# Altium PCB lipo-supply.PcbDoc
Units mil, origin at the board's own origin, x right, y up, seen from the top; angles counter-clockwise.
Board outline 1800 x 3400 mil, 2 copper layers (Top Layer, Bottom Layer); 21 components, 17 nets, 62 pads, 8 vias.
Unrouted connection lines stored in the file: 2.
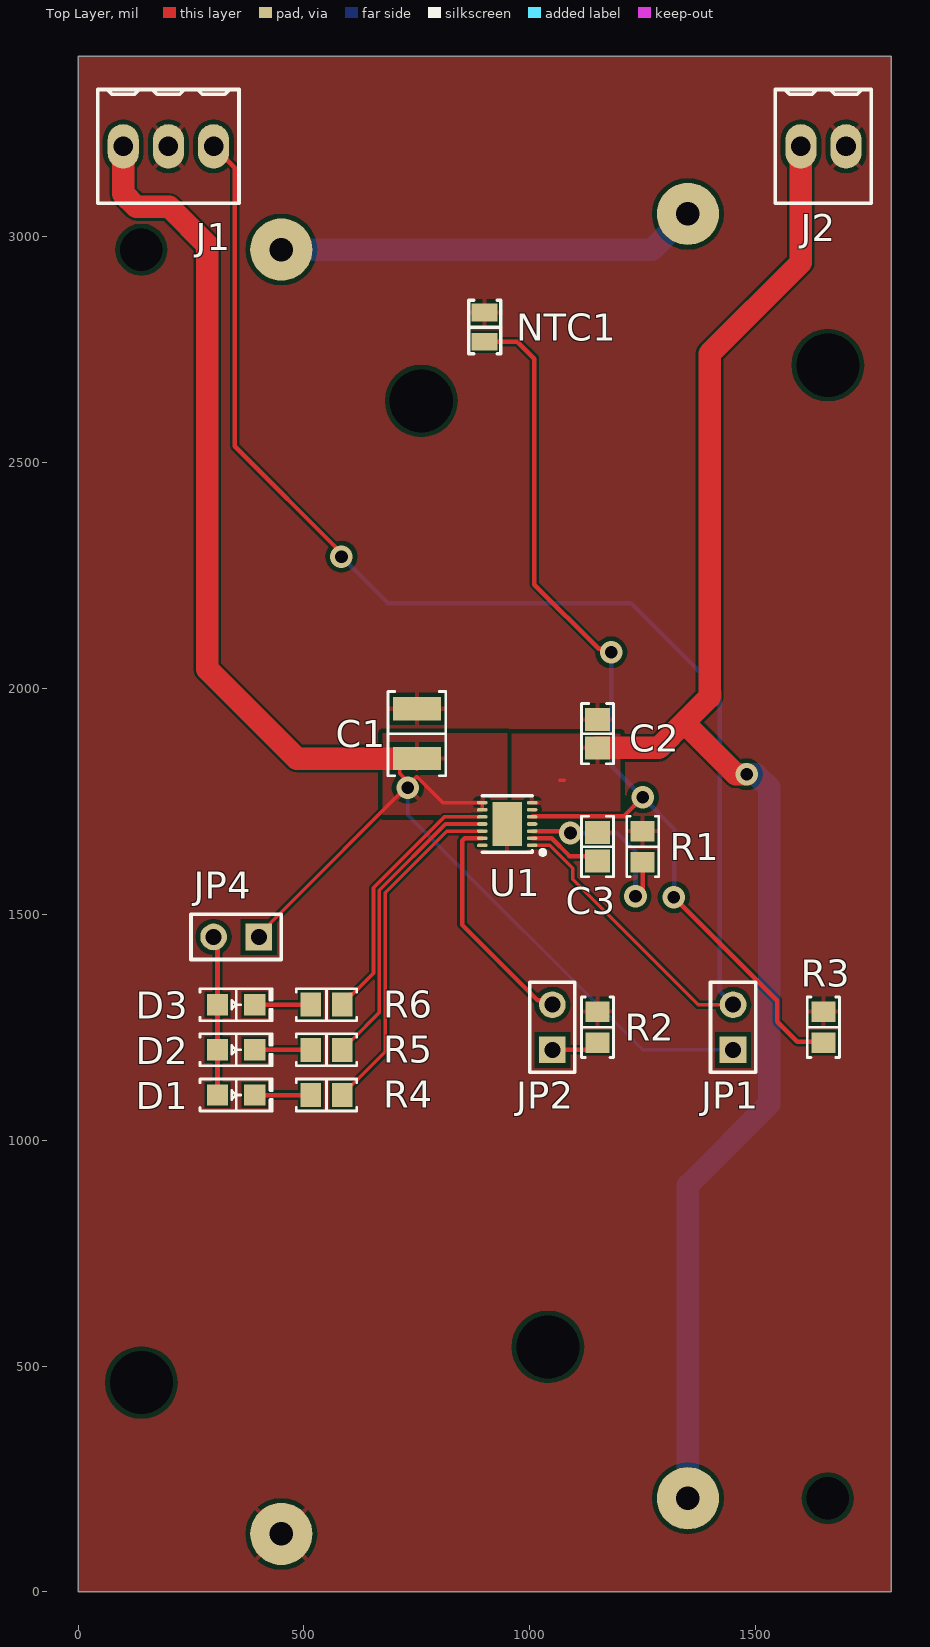
[diagram p0: Top Layer view]
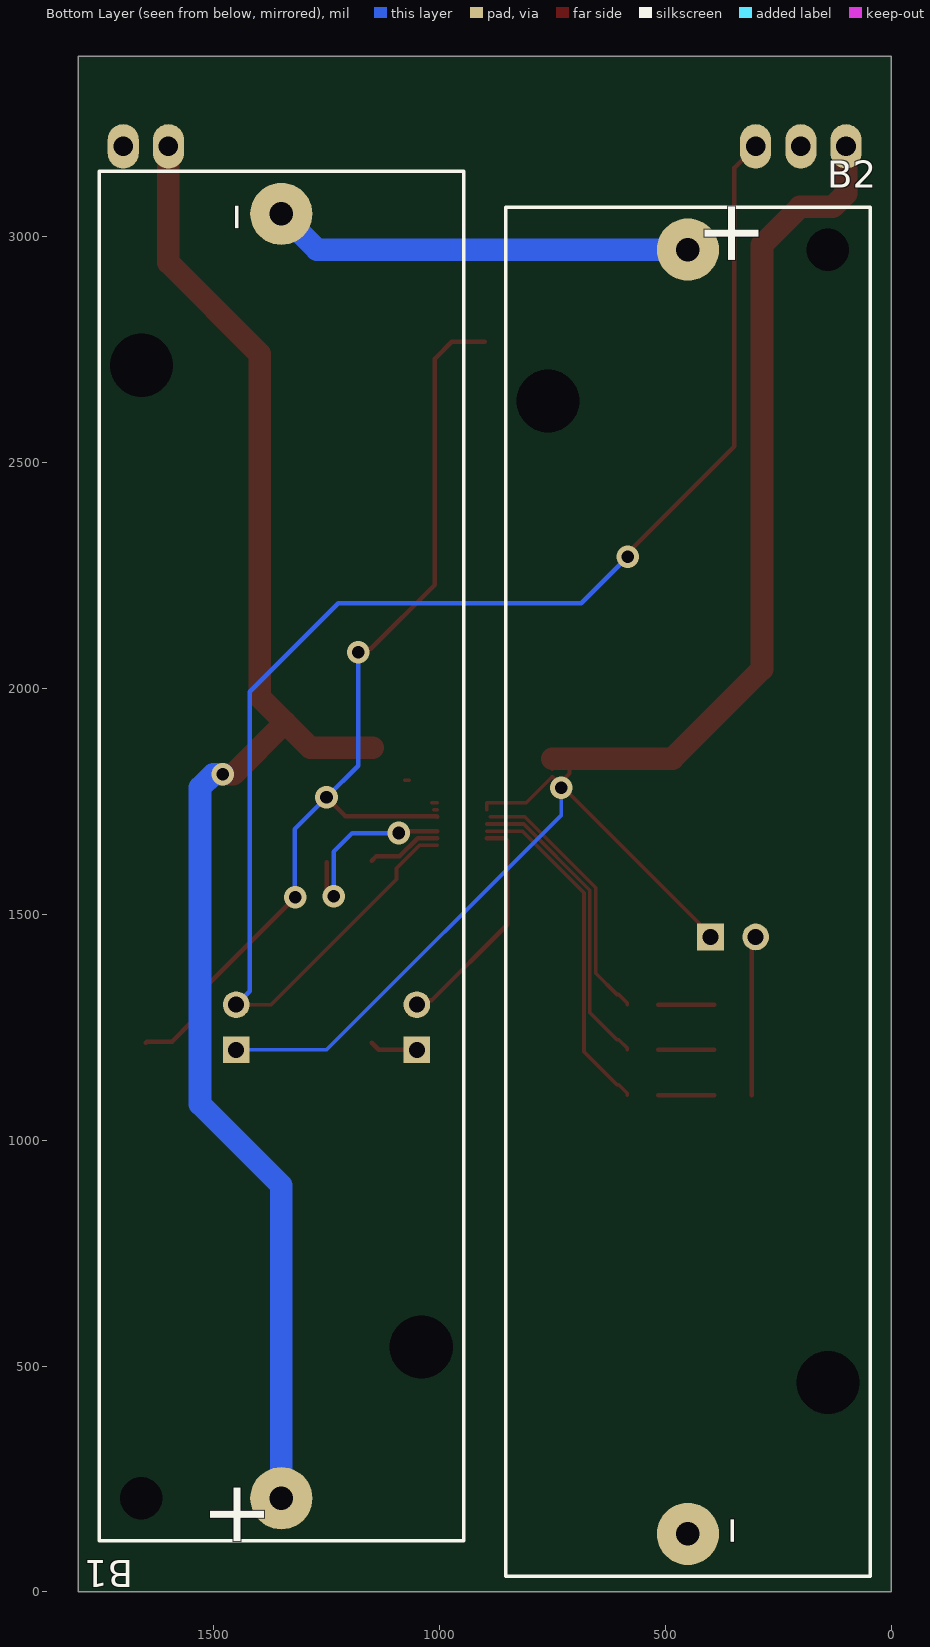
[diagram p1: Bottom Layer view, seen from below]
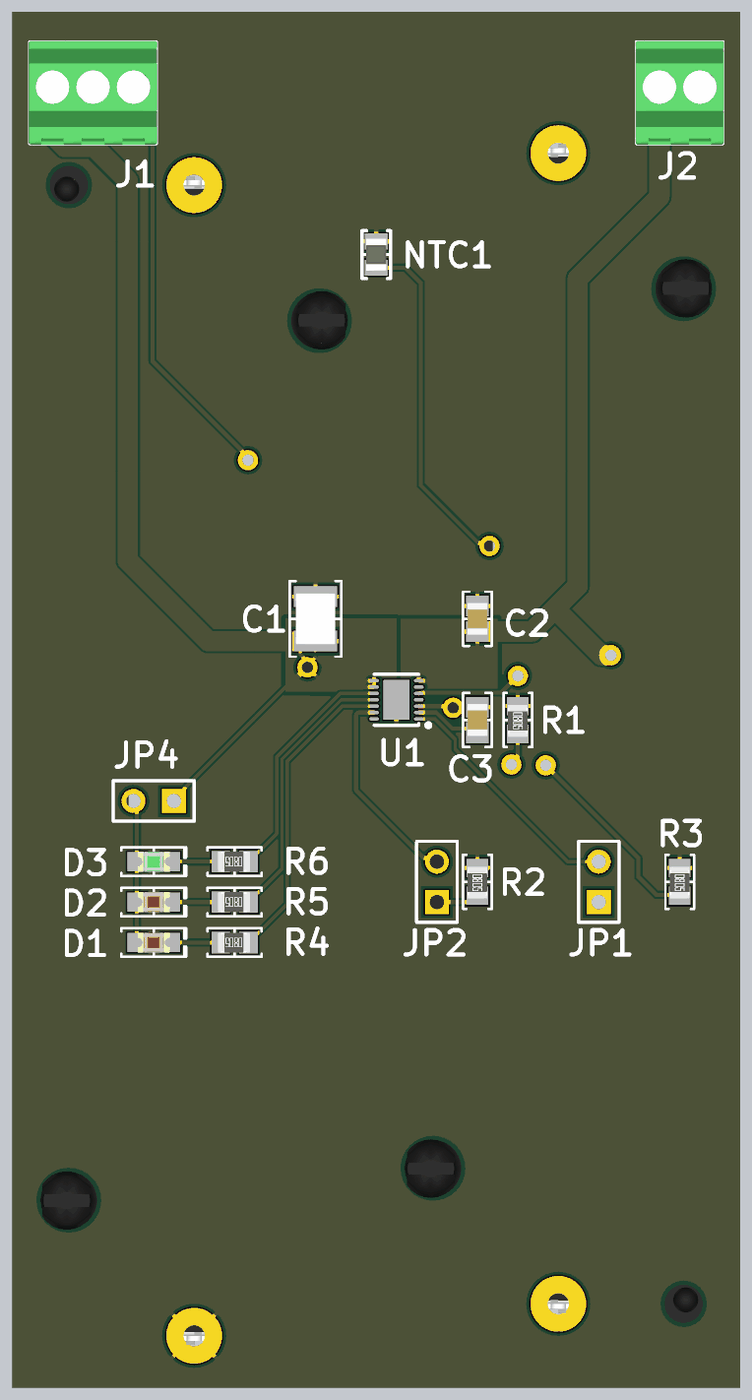
[diagram p2: 3D render of the assembled board from above, using the file's embedded part models]

## Layer stack, top to bottom
Top Solder: solder mask 0.4, Solder Resist, Dk 3.5
Top Layer: signal copper 1.4
Dielectric 1: dielectric 12.6, FR-4, Dk 4.8
Bottom Layer: signal copper 1.4
Bottom Solder: solder mask 0.4, Solder Resist, Dk 3.5

## Board outline
0,0 1800,0 1800,3400 0,3400

## Design rules (kind name [scope] priority, off if disabled: settings)
Clearance [All] p1: gap=5 ignorepadtopadclearanceinfootprint=FALSE except(0: THPad-Hole Via-Hole Fill-Hole Poly-Hole Region-Hole Text-Hole; 10: THPad-THPad THPad-Via THPad-Fill THPad-Poly THPad-Region THPad-Text Via-Via Via-Fill Via-Poly Via-Region Via-Text Fill-Fill Fill-Poly Fill-Region Fill-Text Poly-Poly Poly-Region Poly-Text Region-Region Region-Text Text-Text)
PolygonConnect [All] p1: thpad.connectstyle=Relief thpad.reliefconductorwidth=10 thpad.reliefentries=4 thpad.polygonreliefangle="45 Angle" thpad.airgapwidth=10 smdpad.connectstyle=Relief smdpad.reliefconductorwidth=10 smdpad.reliefentries=4 smdpad.polygonreliefangle="90 Angle" smdpad.airgapwidth=10 via.connectstyle=Relief via.reliefconductorwidth=10 via.reliefentries=4 via.polygonreliefangle="45 Angle" via.airgapwidth=10
RoomDefinition lipo-supply [InComponentClass('lipo-supply')] p1: confinementstyle=ConfineIn formatcopy=TRUE lockcomponents=FALSE outline 6045,60 12600,60 12600,3230 6045,3230
RoutingVias [All] p1: holewidth=28 width=50 viastyle="Through Hole" minholewidth=28 minwidth=50 maxholewidth=28 maxwidth=50
SolderMaskExpansion [All] p1: expansion=4 istentingtop=FALSE
Width [All] p1: maxlimit=100 minlimit=8 preferedwidth=10 minimp=50.000000 maximp=50.000000 favimp=50.000000
30 further rules are at their usual default settings.

## Components (designator, comment, footprint, x,y, rotation, side; value= is the part's Value field where it differs from the comment)
B1 "1043" "KEYSTONE 1043" 1350,1628.98 r270 bottom
B2 "1043" "KEYSTONE 1043" 450,1550 r90 bottom
C1 "10µF" "CAP 1210_3225 - 2.8MM" 750,1900 r270 top
C2 "10µF" "CAP 0805_2012" 1150,1900 r270 top
C3 "0.1µF" "CAP 0805_2012" 1150,1650 r270 top
D1 "Red" "LED 0805_2012 RED" 350,1100 r0 top
D2 "Red" "LED 0805_2012 RED" 350,1200 r0 top
D3 "Green" "LED 0805_2012 GREEN" 350,1300 r0 top
J1 "282834-3" "TE 282834-3" 200,3200 r0 top
J2 "282834-2" "TE 282834-2" 1650,3200 r0 top
JP1 "Header 2" HDR1X2 1450,1200 r90 top
JP2 "Header 2" HDR1X2 1050,1200 r90 top
JP4 "Header 2" HDR1X2 400,1450 r180 top
NTC1 "NTC0805J10K" "NTC 0805_2012" 900,2800 r90 top
R1 "1.74 kOhms" "RES 0805_2012" 1250,1650 r270 top
R2 "10 kOhms" "RES 0805_2012" 1150,1250 r270 top
R3 "10 kOhms" "RES 0805_2012" 1650,1250 r270 top
R4 "2.2 kOhms" "RES 0805_2012" 550,1100 r180 top
R5 "2.2 kOhms" "RES 0805_2012" 550,1200 r180 top
R6 "2.2 kOhms" "RES 0805_2012" 550,1300 r180 top
U1 "AAT3663IWO-8.4-2-T1" "SKYWORKS TDFN-14 3X3MM" 950,1700 r180 top

## Footprints (in the part's own frame and the unit in brackets; to place one, negate y for a bottom-side part, rotate by r counter-clockwise, add the part's x,y. Pads: shape width x height; smd on the part's side, far side on the other; paste and mask are expansions set on the pad)
"CAP 0805_2012" [mm] "Chip Capacitor, 2-Leads, Body 2.00x1.20mm, IPC Medium Density"
  rect 1.3x1.4 smd: 1(-0.8,0) 2(0.8,0)
  silkscreen extent -1.7,-0.9 1.7,0.9, body extent -1,-0.64 1,0.64, height 1.26
"CAP 1210_3225 - 2.8MM" [mm] "Chip Capacitor, 2-Leads, Body 3.20x2.50mm, IPC Medium Density"
  rect 1.3x2.7 smd: 1(-1.4,0) 2(1.4,0)
  silkscreen extent -2.37,-1.63 2.37,1.63, body extent -1.6,-1.25 1.6,1.25, height 2.8
HDR1X2 [mm] "Connector; Header; 2 Position"
  rect 1.5x1.5 hole 0.9: 1(0,0)
  round 1.5 hole 0.9: 2(2.54,0)
  silkscreen extent -1.27,-1.27 3.81,1.27
"KEYSTONE 1043" [mm]
  round 3.5 hole 1.32 unplated: 1(36.11,0) 2(-36.11,0)
  rect 0x0 hole 3.55 unplated: M(-27.6,-7.87) M(27.6,7.87)
  rect 0x0 hole 2.39 unplated: M(36.11,-7.87)
  silkscreen extent -38.5,-10.25 38.5,10.25, body extent -38.53,-10.32 38.53,10.33, height 14.86
"LED 0805_2012 GREEN" [mm] "Chip Diode, 2-Leads, Body 2.00x1.25mm, IPC Medium Density"
  rect 1.2x1.2 smd: 1(-1.05,0) 2(1.05,0)
  silkscreen extent -2.03,-0.9 2.03,0.9, body extent -1,-0.62 1,0.63, height 0.9
"LED 0805_2012 RED" [mm] "Chip Diode, 2-Leads, Body 2.00x1.25mm, IPC Medium Density"
  rect 1.2x1.2 smd: 1(-1.05,0) 2(1.05,0)
  silkscreen extent -2.03,-0.9 2.03,0.9, body extent -1,-0.62 1,0.63, height 0.9
"NTC 0805_2012" [mm] "Chip Thermistor, 2-Leads, Body 2.00x1.25mm, IPC Medium Density"
  rect 1x1.45 smd: 1(-0.825,0) 2(0.825,0)
  silkscreen extent -1.5,-0.9 1.5,0.9, body extent -1,-0.64 1,0.64, height 1.27
"RES 0805_2012" [mm] "Chip Resistor, 2-Leads, Body 2.00x1.25mm, IPC Medium Density"
  rect 1.15x1.35 smd: 1(-0.875,0) 2(0.875,0)
  silkscreen extent -1.7,-0.9 1.7,0.9, body extent -0.95,-0.62 1.05,0.63, height 0.6
"SKYWORKS TDFN-14 3X3MM" [mm] "TDFN, 14-Leads, Body 3.00x3.00mm, Pitch 0.40mm, Thermal Pad 1.65x2.50mm, IPC Medium Density"
  oval 0.6x0.2 smd: 1(-1.4,1.2) 2(-1.4,0.8) 3(-1.4,0.4) 4(-1.4,0) 5(-1.4,-0.4) 6(-1.4,-0.8) 7(-1.4,-1.2) 8(1.4,-1.2) 9(1.4,-0.8) 10(1.4,-0.4) 11(1.4,0) 12(1.4,0.4) 13(1.4,0.8) 14(1.4,1.2)
  rect 1.65x2.5 smd: 15(0,0)
  silkscreen extent -2.13,-1.6 1.4,1.72, body extent -1.53,-1.53 1.53,1.53, height 0.8
"TE 282834-2" [mm]
  oval 1.75x2.5 hole 1.1: 1(-1.27,0) 2(1.27,0)
  silkscreen extent -2.7,-3.2 2.7,3.2, body extent -2.77,-3.25 2.77,3.25, height 10
"TE 282834-3" [mm]
  oval 1.75x2.5 hole 1.1: 1(-2.54,0) 2(0,0) 3(2.54,0)
  silkscreen extent -3.97,-3.2 3.97,3.2, body extent -4.04,-3.25 4.04,3.25, height 10

## Part data
B1 B2: "BATTERY HOLDER 18650 PC PIN", Manufacturer="Keystone Electronics", Operating Temperature="-50°C ~ 145°C", Supplier Part Number 1=36-1043-ND, Battery Cell Size=18650, Battery Type, Function="Cylindrical, Holder", ComponentLink1Description=Datasheet, ComponentLink1URL=http://keyelco.com/userAssets/file/M65p27.pdf, ComponentLink2Description="DigiKey Link", ComponentLink2URL=http://digikey.com/product-detail/en/keystone-electronics/1043/36-1043-ND/2745669, Height Above Board="0.585\" (14.86mm)", LastUpdated="2/2/2020 9:19:56 AM", Lifecycle Status=Active, Minimum Order=1, Mounting Type="PCB, Through Hole", Number of Cells=1, Packaging=Unknown, Part Number=1043, Part Status=Active, PartId=2, Price=2.58, Series=-, Style="Holder (Open)", Supplier 1=DigiKey, Termination Style="PC Pin"
C1: library part GCG32ER71E106KA12L, "CAP CER 10UF 25V X7R 1210 EPOXY", Device Package="1210 (3225 Metric)", Manufacturer="Murata Electronics", Operating Temperature="-55°C ~ 125°C", Ratings=AEC-Q200, Supplier Part Number 1=490-18199-1-ND, Temperature Coefficient=X7R, Tolerance=±10%, Voltage - Rated=25V, Applications=Automotive, Capacitance=10µF, ComponentLink1Description=Datasheet, ComponentLink1URL=https://search.murata.co.jp/Ceramy/image/img/A01X/G101/ENG/GCG32ER71E106KA12-01.pdf, ComponentLink2Description="DigiKey Link", ComponentLink2URL=http://digikey.com/product-detail/en/murata-electronics/GCG32ER71E106KA12L/490-18199-1-ND/9867928, Features="Epoxy Mountable", LastUpdated="1/21/2020 12:30:50 AM", Lifecycle Status=Active, Minimum Order=1, Mounting Type="Surface Mount, MLCC, Epoxy", Package / Case="1210 (3225 Metric)", Packaging=TapeAndReel, Part Number=GCG32ER71E106KA12L, Part Status=Active, PartId=23619, Price=0.52, Series=GCG, Size / Dimension="0.126\" L x 0.098\" W (3.20mm x 2.50mm)", Supplier 1=DigiKey, Thickness (Max)="0.110\" (2.80mm)"
C2: library part EMK212BB7106MG-T, "CAP CER 10UF 16V X7R 0805", Device Package="0805 (2012 Metric)", Manufacturer="Taiyo Yuden", Operating Temperature="-55°C ~ 125°C", Supplier Part Number 1=587-3319-1-ND, Temperature Coefficient=X7R, Tolerance=±20%, Voltage - Rated=16V, Applications="General Purpose", Capacitance=10µF, ComponentLink1Description=Datasheet, ComponentLink1URL=http://www.yuden.co.jp/productdata/catalog/mlcc06_e.pdf, ComponentLink2Description="DigiKey Link", ComponentLink2URL=http://digikey.com/product-detail/en/taiyo-yuden/EMK212BB7106MG-T/587-3319-1-ND/4157364, LastUpdated="1/21/2020 12:03:05 AM", Lifecycle Status=Active, Minimum Order=1, Mounting Type="Surface Mount, MLCC", Package / Case="0805 (2012 Metric)", Packaging=TapeAndReel, Part Number=EMK212BB7106MG-T, Part Status=Active, PartId=3069, Price=0.11, Series=M, Size / Dimension="0.079\" L x 0.049\" W (2.00mm x 1.25mm)", Supplier 1=DigiKey, Thickness (Max)="0.053\" (1.35mm)"
C3: library part 0805B104K160CT, "CAP CER 0.1UF 16V X7R 0805", Device Package="0805 (2012 Metric)", Manufacturer="Walsin Technology Corporation", Operating Temperature="-55°C ~ 125°C", Supplier Part Number 1=1292-1565-1-ND, Temperature Coefficient=X7R, Tolerance=±10%, Voltage - Rated=16V, Applications="General Purpose", Capacitance=0.1µF, ComponentLink1Description=Datasheet, ComponentLink1URL=http://www.passivecomponent.com/wp-content/uploads/2018/10/MLCC.pdf, ComponentLink2Description="DigiKey Link", ComponentLink2URL=http://digikey.com/product-detail/en/walsin-technology-corporation/0805B104K160CT/1292-1565-1-ND/9355569, LastUpdated="1/21/2020 12:03:02 AM", Lifecycle Status=Active, Minimum Order=1, Mounting Type="Surface Mount, MLCC", Package / Case="0805 (2012 Metric)", Packaging=TapeAndReel, Part Number=0805B104K160CT, Part Status=Active, PartId=4882, Price=0.02, Series=-, Size / Dimension="0.079\" L x 0.049\" W (2.00mm x 1.25mm)", Supplier 1=DigiKey, Thickness (Max)="0.035\" (0.90mm)"
D1 D2: library part 5990110007F, "LED RED 0805 SMD", Current - Test=20mA, Device Package="0805 (2012 Metric)", Lens Color=0.80mm, Manufacturer=Dialight, Millicandela Rating=29mcd, Supplier Device Package=0805, Supplier Part Number 1=350-4353-1-ND, Voltage - Forward (Vf) (Typ)=2.1V, Color=Red, ComponentLink1Description=Datasheet, ComponentLink1URL=http://www.dialightsignalsandcomponents.com/Assets/Brochures_And_Catalogs/Indication/CBI_SMD_new/Dialight_CBI_data_599-0805_Apr2018.pdf, ComponentLink2Description="DigiKey Link", ComponentLink2URL=http://digikey.com/product-detail/en/dialight/5990110007F/350-4353-1-ND/9385459, Configuration=Standard, Height (Max)=0.80mm, LastUpdated="1/21/2020 3:13:52 AM", Lens Size="1.40mm x 1.25mm", Lens Style="Rectangle with Flat Top", Lifecycle Status=Active, Minimum Order=1, Mounting Type="Surface Mount", Package / Case="0805 (2012 Metric)", Packaging=TapeAndReel, Part Number=5990110007F, Part Status=Active, PartId=308, Price=0.07, Series=599, Size / Dimension="2.00mm L x 1.25mm W", Supplier 1=DigiKey, Viewing Angle=140°, Wavelength - Dominant=633nm
D3: library part 5975316507F, "LED GREEN 0805 SMD", Current - Test=20mA, Device Package="0805 (2012 Metric)", Lens Color=0.93mm, Manufacturer=Dialight, Millicandela Rating=16mcd, Supplier Device Package=0805, Supplier Part Number 1=350-4389-1-ND, Voltage - Forward (Vf) (Typ)=2.2V, Color=Green, ComponentLink1Description=Datasheet, ComponentLink1URL=http://www.dialightsignalsandcomponents.com/Assets/Drawings/2D_Drawings_DrawingDetailedSpec/NewDrawings/18370A.pdf, ComponentLink2Description="DigiKey Link", ComponentLink2URL=http://digikey.com/product-detail/en/dialight/5975316507F/350-4389-1-ND/9385495, Configuration=Standard, Height (Max)=0.93mm, LastUpdated="1/21/2020 3:14:10 AM", Lens Size="1.40mm x 1.24mm", Lens Style="Rectangle with Flat Top", Lifecycle Status=Active, Minimum Order=1, Mounting Type="Surface Mount", Package / Case="0805 (2012 Metric)", Packaging=TapeAndReel, Part Number=5975316507F, Part Status=Active, PartId=245, Price=0.15, Series=597, Size / Dimension="2.00mm L x 1.25mm W", Supplier 1=DigiKey, Wavelength - Dominant=560nm
J1: "TERM BLK 3P SIDE ENT 2.54MM PCB", Color=Green, Current=10A, Manufacturer="TE Connectivity AMP Connectors", Supplier Part Number 1=A98334-ND, Voltage=150V, ComponentLink1Description=Datasheet, ComponentLink1URL=https://www.te.com/commerce/DocumentDelivery/DDEController?Action=srchrtrv&DocNm=282834&DocType=Customer+Drawing&DocLang=English, ComponentLink2Description="DigiKey Link", ComponentLink2URL=http://digikey.com/product-detail/en/te-connectivity-amp-connectors/282834-3/A98334-ND/1153264, LastUpdated="1/15/2020 4:15:50 AM", Lifecycle Status=Active, Mating Orientation="Horizontal with Board", Minimum Order=1, Mounting Type="Through Hole", Number of Levels=1, Packaging=Bulk, Part Number=282834-3, Part Status=Active, Pitch="0.100\" (2.54mm)", Positions Per Level=3, Price=2.01, Series=Buchanan, Supplier 1=DigiKey, Wire Gauge="16-30 AWG", Wire Termination="Screw - Rising Cage Clamp"
J2: "TERM BLK 2P SIDE ENT 2.54MM PCB", Color=Green, Current=10A, Manufacturer="TE Connectivity AMP Connectors", Supplier Part Number 1=A98333-ND, Voltage=150V, ComponentLink1Description=Datasheet, ComponentLink1URL=https://www.te.com/commerce/DocumentDelivery/DDEController?Action=srchrtrv&DocNm=282834&DocType=Customer+Drawing&DocLang=English, ComponentLink2Description="DigiKey Link", ComponentLink2URL=http://digikey.com/product-detail/en/te-connectivity-amp-connectors/282834-2/A98333-ND/1150135, LastUpdated="1/15/2020 4:15:38 AM", Lifecycle Status=Active, Mating Orientation="Horizontal with Board", Minimum Order=1, Mounting Type="Through Hole", Number of Levels=1, Packaging=Bulk, Part Number=282834-2, Part Status=Active, Pitch="0.100\" (2.54mm)", Positions Per Level=2, Price=0.88, Series=Buchanan, Supplier 1=DigiKey, Wire Gauge="16-30 AWG", Wire Termination="Screw - Rising Cage Clamp"
JP1 JP2 JP4: "Header, 2-Pin", LatestRevisionDate=17-Jul-2002, LatestRevisionNote="Re-released for DXP Platform.", Publisher="Altium Limited"
NTC1: "THERMISTOR NTC 10KOHM 0805", B Value Tolerance=±5%, Device Package="0805 (2012 Metric)", Manufacturer="TE Connectivity Passive Product", Operating Temperature="-55°C ~ 125°C", Power - Max=125mW, Resistance in Ohms @ 25°C=10k, Supplier Part Number 1=A106104CT-ND, ComponentLink1Description=Datasheet, ComponentLink1URL=https://www.te.com/commerce/DocumentDelivery/DDEController?Action=srchrtrv&DocNm=1624345&DocType=Customer+Drawing&DocLang=English, ComponentLink2Description="DigiKey Link", ComponentLink2URL=http://digikey.com/product-detail/en/te-connectivity-passive-product/NTC0805J10K/A106104CT-ND/3477761, LastUpdated="1/21/2020 3:31:41 AM", Lifecycle Status=Active, Minimum Order=1, Mounting Type="Surface Mount", Package / Case="0805 (2012 Metric)", Packaging=TapeAndReel, Part Number=NTC0805J10K, Part Status=Active, PartId=574, Price=0.40, Resistance Tolerance=±5%, Series=Neohm, Supplier 1=DigiKey
R1: library part KTR10EZPF1741, "RES SMD 1.74K OHM 1% 1/8W 0805", Device Package="0805 (2012 Metric)", Manufacturer="Rohm Semiconductor", Operating Temperature="-55°C ~ 155°C", Power (Watts)="0.125W, 1/8W", Ratings=AEC-Q200, Supplier Device Package=0805, Supplier Part Number 1=RHM1.74KAHCT-ND, Temperature Coefficient=±100ppm/°C, Tolerance=±1%, ComponentLink1Description=Datasheet, ComponentLink1URL=https://www.rohm.com/datasheet/KTR03EZPF/ktr-e, ComponentLink2Description="DigiKey Link", ComponentLink2URL=http://digikey.com/product-detail/en/rohm-semiconductor/KTR10EZPF1741/RHM1.74KAHCT-ND/4054354, Composition="Thick Film", Features="Automotive AEC-Q200, High Voltage", Height - Seated (Max)="0.026\" (0.65mm)", LastUpdated="1/21/2020 1:49:27 AM", Lifecycle Status=Active, Minimum Order=1, Number of Terminations=2, Package / Case="0805 (2012 Metric)", Packaging=TapeAndReel, Part Number=KTR10EZPF1741, Part Status=Active, PartId=29167, Price=0.02, Resistance="1.74 kOhms", Series=KTR, Size / Dimension="0.079\" L x 0.049\" W (2.00mm x 1.25mm)", Supplier 1=DigiKey
R2 R3: library part RT0805DRD0710KL, "RES SMD 10K OHM 0.5% 1/8W 0805", Device Package="0805 (2012 Metric)", Manufacturer=Yageo, Operating Temperature="-55°C ~ 155°C", Power (Watts)="0.125W, 1/8W", Supplier Device Package=0805, Supplier Part Number 1=311-2699-1-ND, Temperature Coefficient=±25ppm/°C, Tolerance=±0.5%, ComponentLink1Description=Datasheet, ComponentLink1URL=https://www.yageo.com/upload/media/product/productsearch/datasheet/rchip/PYu-RT_1-to-0.01_RoHS_L_11.pdf, ComponentLink2Description="DigiKey Link", ComponentLink2URL=http://digikey.com/product-detail/en/yageo/RT0805DRD0710KL/311-2699-1-ND/6129118, Composition="Thin Film", Height - Seated (Max)="0.024\" (0.60mm)", LastUpdated="1/21/2020 1:50:02 AM", Lifecycle Status=Active, Minimum Order=1, Number of Terminations=2, Package / Case="0805 (2012 Metric)", Packaging=TapeAndReel, Part Number=RT0805DRD0710KL, Part Status=Active, PartId=27797, Price=0.03, Resistance="10 kOhms", Series=RT, Size / Dimension="0.079\" L x 0.049\" W (2.00mm x 1.25mm)", Supplier 1=DigiKey
R4 R5 R6: library part SR0805JR-7W2K2L, "RES SMD 2.2K OHM 5% 1/4W 0805", Device Package="0805 (2012 Metric)", Manufacturer=Yageo, Operating Temperature="-55°C ~ 155°C", Power (Watts)="0.25W, 1/4W", Ratings=AEC-Q200, Supplier Device Package=0805, Supplier Part Number 1=YAG6054CT-ND, Temperature Coefficient=±200ppm/°C, Tolerance=±5%, ComponentLink1Description=Datasheet, ComponentLink1URL=http://www.yageo.com/documents/recent/PYu-SR_20105_RoHS_L_8.pdf, ComponentLink2Description="DigiKey Link", ComponentLink2URL=http://digikey.com/product-detail/en/yageo/SR0805JR-7W2K2L/YAG6054CT-ND/9696508, Composition="Thick Film", Features="Automotive AEC-Q200, Pulse Withstanding", Height - Seated (Max)="0.024\" (0.60mm)", LastUpdated="1/21/2020 1:50:02 AM", Lifecycle Status=Active, Minimum Order=1, Number of Terminations=2, Package / Case="0805 (2012 Metric)", Packaging=TapeAndReel, Part Number=SR0805JR-7W2K2L, Part Status=Active, PartId=27793, Price=0.03, Resistance="2.2 kOhms", Series=SR, Size / Dimension="0.079\" L x 0.049\" W (2.00mm x 1.25mm)", Supplier 1=DigiKey
U1: "IC LI-ION CHARGER 14-DFN", Battery Pack Voltage=8.4V, Charge Current - Max=1A, Current - Charging="Constant - Programmable", Device Package="14-WFDFN Exposed Pad", Manufacturer="Skyworks Solutions Inc.", Operating Temperature="-40°C ~ 85°C (TA)", Supplier Device Package="14-TDFN (3x3)", Supplier Part Number 1=863-1544-2-ND, Voltage - Supply (Max)=13.2V, Battery Chemistry="Lithium Ion/Polymer", ComponentLink1Description=Datasheet, ComponentLink1URL=http://www.skyworksinc.com/uploads/documents/AAT3663_201878C.pdf, ComponentLink2Description="DigiKey Link", ComponentLink2URL=//digikey.com/product-detail/en/skyworks-solutions-inc/AAT3663IWO-8.4-2-T1/863-1544-2-ND/4753043, Fault Protection="Over Current, Over Temperature, Over Voltage, Short Circuit", Interface=USB, LastUpdated="12/6/2019 2:00:27 AM", Lifecycle Status=0, Minimum Order=1, Mounting Type="Surface Mount", Number of Cells=2, Package / Case="14-WFDFN Exposed Pad", Packaging=TapeAndReel, Part Number=AAT3663IWO-8.4-2-T1, Part Status=Active, PartId=23, Price=0.78, Programmable Features=Current, Series=BatteryManager™, Supplier 1=DigiKey

## Via types
v1: diameter 50, hole 28, Top Layer to Bottom Layer, 8 vias

## Nets (pads, with @x,y where several pads share a name; then routed paths per layer and width w, separated by ;. In a path a pad name is that pad's centre, name@x,y a point inside that pad or via, vN(x,y) a via of type N, cw(c..) or ccw(c..) an arc to the next point about the centre after c; other vN are vias at no path point)
EN: J1.3 JP1.2 U1.1 | length 3296.6
  Top Layer w8: U1.1 1044.24,1652.76 1095,1602 1095,1578 1373,1300 JP1.2
  Top Layer w10: J1.3 347,3153 347,2536 583,2300 v1(583,2292)
  Bottom Layer w10: v1(583,2292) 686,2189 1224,2189 1420,1993 1420,1330 JP1.2
GND: B2.2 C1.1 C2.1 C3.1 J1.2 J2.2 NTC1.2 R1.1 R2.1 R3.1 U1.4 U1.15
IN: C1.2 J1.1 JP1.1 JP4.1 U1.8 U1.9 | length 3657.7
  Top Layer w8: JP4.1 425.53,1475.53 425.53,1480.53 750,1805 752.5,1802.5 807.76,1747.24 U1.8 U1.9 ; v1(730,1780) 730,1793.96 711.98,1811.98 711.98,1823.29 720.09,1831.41 733.57,1844.88 C1.2 ; C1.2 750,1821.12 761.88,1833 C1.2
  Top Layer w50: J1.1 100,3095.29 129.29,3066 202,3066 286,2982 286,2043 484.12,1844.88 C1.2
  Bottom Layer w8: v1(730,1780) 730,1720 1250,1200 JP1.1
NetB1_1: B1.1 C2.2 J2.1 U1.6 U1.7 | length 3524.5
  Top Layer w8: U1.6 U1.6@1012.87,1731.5 ; U1.7 U1.7@1016.82,1747.24 ; 1066.65,1797.08 1076.61,1797.08
  Top Layer w50: C2.2@1148.03,1868.5 C2.2 1285.5,1868.5 1341.75,1924.75 ; v1(1480,1810) 1456.5,1810 1341.75,1924.75 ; J2.1 1600,2943 1398,2741 1398,1981 1341.75,1924.75
  Bottom Layer w50: B1.1 1350,900 1530,1080 1530,1780.71 1500.71,1810 v1(1480,1810)
NetB1_2: B1.2 B2.1 | length 932.7
  Bottom Layer w50: B2.1 1271.02,2971.65 B1.2
NetC3_2: C3.2 U1.2 | length 165.6
  Top Layer w10: U1.2 1048.3,1668.5 1087.8,1629 1139.5,1629 C3.2
NetD1_1: D1.1 D2.1 D3.1 JP4.2 | length 353.6
  Top Layer w10: JP4.2 308.66,1441.34 D3.1 D2.1 D1.1
NetD1_2: D1.2 R4.2 | length 124.2
  Top Layer w10: D1.2 R4.2
NetD2_2: D2.2 R5.2 | length 124.2
  Top Layer w10: D2.2 R5.2
NetD3_2: D3.2 R6.2 | length 124.2
  Top Layer w10: D3.2 R6.2
NetJP2_1: JP2.1 R2.2 | length 106.4
  Top Layer w10: JP2.1 1134.45,1200 R2.2
NetJP2_2: JP2.2 U1.13 | length 506.3
  Top Layer w10: U1.13 855.86,1668.5 850,1662.65 850,1477 1017.61,1309.39 1040.61,1309.39 JP2.2
NetNTC1_1: NTC1.1 R3.2 U1.5 | length 2212.9
  Top Layer w10: NTC1.1 972.48,2767.52 1010,2730 1010,2230 1152.35,2087.65 1172.35,2087.65 v1(1180,2080) ; U1.5 1006.18,1716.81 1014.05,1716.81 1014.8,1717.56 1208.66,1717.56 v1(1250,1758.9) ; v1(1319,1538) 1548,1309 1548,1262 1592,1218 1647.55,1218 R3.2
  Bottom Layer w10: v1(1180,2080) 1180,1828.9 v1(1250,1758.9) 1320,1688.9 1320,1539 v1(1319,1538)
NetR1_2: R1.2 U1.3 | length 432.9
  Top Layer w10: U1.3 1085.75,1684.25 v1(1090,1680) ; v1(1234,1540) 1236,1542 1243,1542 1250,1549 R1.2
  Bottom Layer w10: v1(1090,1680) 1193,1680 1234,1639 v1(1234,1540)
NetR4_1: R4.1 U1.12 | length 761.2
  Top Layer w8: R4.1 584.45,1103.94 603.09,1122.57 607.02,1122.57 680,1195.55 680,1548 816.25,1684.25 U1.12
NetR5_1: R5.1 U1.11 | length 678.5
  Top Layer w8: R5.1 584.45,1203.94 603.09,1222.57 607.02,1222.57 667,1282.55 667,1553.38 813.62,1700 U1.11
NetR6_1: R6.1 U1.10 | length 588
  Top Layer w8: R6.1 584.45,1303.94 603.09,1322.57 607.02,1322.57 654,1369.55 654,1558.77 810.98,1715.75 U1.10@887.07,1715.75
pads on no net: B1.M B2.M U1.14

## Polygon pours and split planes (outlines as drawn)
GND on Top Layer "GND" (solid, pour order 9): 0,3400 1800,3400 1800,0 0,0
NetB1_1 on Top Layer "B_+" (solid, pour order 8): 960,1900 960,1720 1200,1720 1200,1900
IN on Top Layer "IN" (solid, pour order 7): 950,1719.68 675,1720 675,1901 696,1901 950,1901
no net on Top Layer "IN" (solid, pour order 5): 918,1777
GND on Top Layer "GND_L01_P006" (solid, pour order 6): 0,3400

## Text inside footprints (layer, text, board x,y; h text height)
B1: Bottom Overlay "+" at 1552.76,251.03 h236.22 r90; Bottom Overlay "-" at 1540.94,3077.8 h236.22 r90
B2: Bottom Overlay "+" at 247.24,2927.95 h236.22 r270; Bottom Overlay "-" at 259.06,101.18 h236.22 r270